# Altium PCB Camera_LED_Module.PcbDoc
Units mm, origin at the board's own origin, x right, y up, seen from the top; angles counter-clockwise.
Board outline 152.4 x 101.6 mm, 2 copper layers (Top Layer, Bottom Layer); 32 components, 17 nets, 82 pads, 0 vias.
Unrouted connection lines stored in the file: 60.
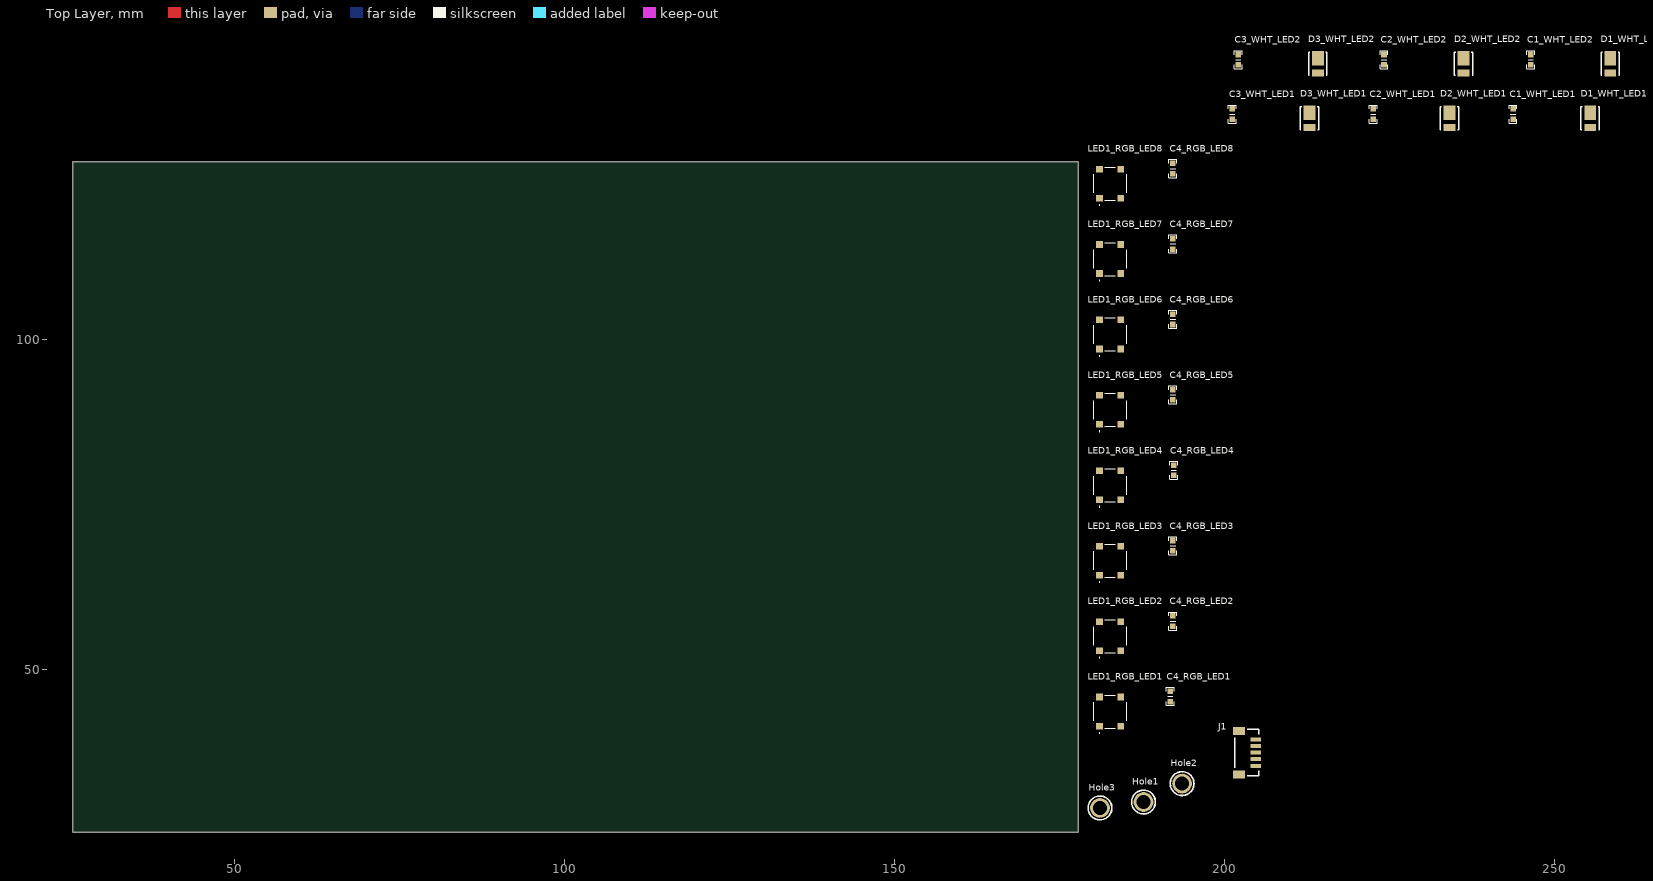
[diagram p0: Top Layer view]
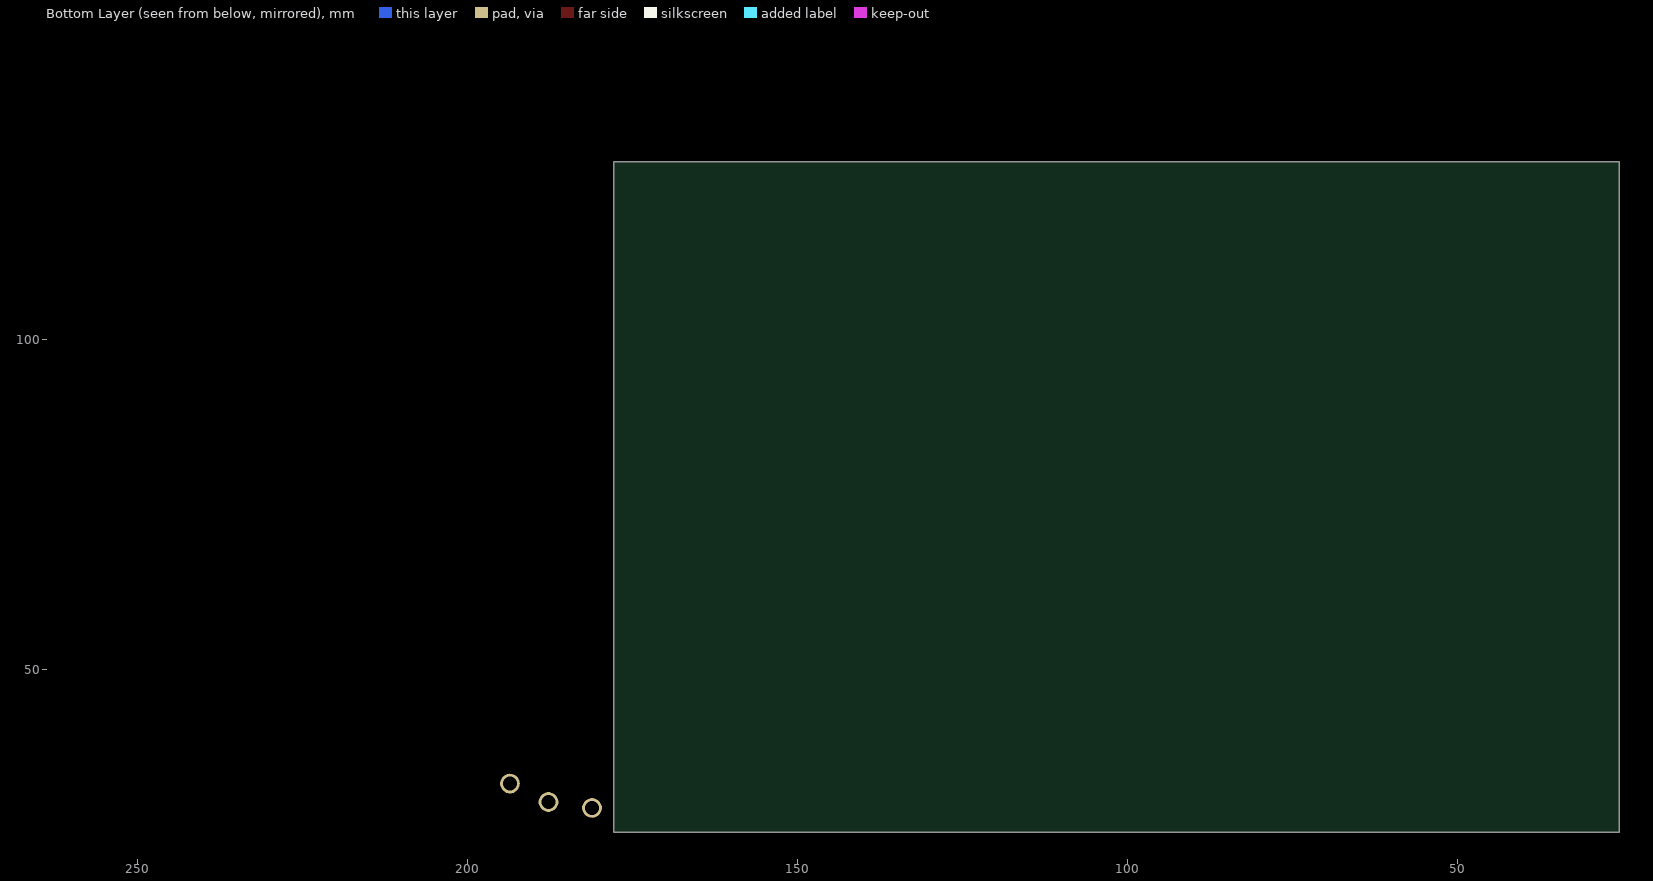
[diagram p1: Bottom Layer view, seen from below]

## Layer stack, top to bottom
Top Solder: solder mask 0.0102, Solder Resist, Dk 3.5
Top Layer: signal copper 0.0356
Dielectric 1: dielectric 0.32, FR-4, Dk 4.8
Bottom Layer: signal copper 0.0356
Bottom Solder: solder mask 0.0102, Solder Resist, Dk 3.5

## Board outline
25.4,25.4 177.8,25.4 177.8,127 25.4,127

## Design rules (kind name [scope] priority, off if disabled: settings)
BoardOutlineClearance [All] p1: gap=0.2 ignorepadtopadclearanceinfootprint=FALSE
Clearance "Stitching GND" [IsStitchingVia and InNet('GND') vs (IsVia and (Not IsStitchingVia)) Or IsPad] p1: gap=0.2 ignorepadtopadclearanceinfootprint=FALSE except(0.15: SMDPad-SMDPad; 0.28: Arc-Hole Track-Hole)
Clearance [All] p2: gap=0.2 ignorepadtopadclearanceinfootprint=FALSE except(0.15: SMDPad-SMDPad; 0.28: Arc-Hole Track-Hole)
HoleSize [All] p1: absolutevalues=TRUE maxlimit=6 minlimit=0.3 maxpercent=80.000 minpercent=20.000
HoleToHoleClearance HoleToHolePad [IsPad vs IsPad] p1: gap=0.45 allowstackedmicrovias=TRUE
HoleToHoleClearance HoleToHoleVia [IsVia vs IsVia] p2: gap=0.2 allowstackedmicrovias=TRUE
HoleToHoleClearance [All] p3: gap=0.3 allowstackedmicrovias=TRUE
MinimumAnnularRing MinimumViaAnnularRing [IsVia] p1: minimumring=0.15
MinimumAnnularRing [All] p2: minimumring=0.254
MinimumSolderMaskSliver [All] p1: minsoldermaskwidth=0.1
PlaneConnect [All] p1: planeconnectstyle=Relief reliefexpansion=0.508 reliefentries=4 reliefconductorwidth=0.32 reliefairgap=0.254
PolygonConnect MolexPwrGND [InNet('GND') vs IsPad And HasFootprint('43045-08YY_121314')] p1: connectstyle=Relief reliefconductorwidth=1 reliefentries=4 polygonreliefangle="90 Angle" conductorbypadedge=TRUE mindistance=0.381 enablemindistance=FALSE airgapwidth=0.35
PolygonConnect DRVTherrmalGND [InNet('GND') vs IsPad And HasFootprint('RXZ0016A-MFG')] p2: connectstyle=Direct reliefconductorwidth=0.254 reliefentries=4 polygonreliefangle="90 Angle" airgapwidth=0.254
PolygonConnect GNDStitchingDirect [InNet('GND')] p3: thpad.connectstyle=Relief thpad.reliefconductorwidth=0.32 thpad.reliefentries=4 thpad.polygonreliefangle="90 Angle" thpad.airgapwidth=0.254 thpad.conductorbypadedge=TRUE thpad.mindistance=0.381 thpad.enablemindistance=FALSE smdpad.connectstyle=Relief smdpad.reliefconductorwidth=0.32 smdpad.reliefentries=4 smdpad.polygonreliefangle="90 Angle" smdpad.airgapwidth=0.254 smdpad.conductorbypadedge=TRUE smdpad.mindistance=0.381 smdpad.enablemindistance=FALSE via.connectstyle=Direct via.reliefconductorwidth=0.254 via.reliefentries=4 via.polygonreliefangle="90 Angle" via.airgapwidth=0.254
PolygonConnect [All] p4: connectstyle=Relief reliefconductorwidth=0.32 reliefentries=4 polygonreliefangle="90 Angle" conductorbypadedge=TRUE mindistance=0.381 enablemindistance=FALSE airgapwidth=0.254
RoutingVias PowerVias [InNetClass('POWER') or InNet('GND')] p1: holewidth=0.5 width=0.8 viastyle="Through Hole" minholewidth=0.3 minwidth=0.6 maxholewidth=1.2 maxwidth=1.6
RoutingVias SignalVias [All] p2: holewidth=0.3 width=0.6 viastyle="Through Hole" minholewidth=0.3 minwidth=0.6 maxholewidth=0.5 maxwidth=0.8
SilkToSilkClearance [All] p1: silktosilkclearance=0.1
SilkToSolderMaskClearance [IsPad] p1: minsilkscreentomaskgap=0.1 clearancetoexposedcopper=TRUE
SolderMaskExpansion [All] p1: expansion=0.05 istentingtop=FALSE
SupplyNets "Schematic Supply Nets_1" [InNet('GND')] p1: voltage=0.000
SupplyNets "Schematic Supply Nets" [InNet('+5V')] p2: voltage=0.000
Width WidthPower [InNetClass('POWER') or InNet('GND')] p1: maxlimit=3 minlimit=0.2 preferedwidth=0.6
Width WidthSignal [All] p2: maxlimit=1 minlimit=0.2 preferedwidth=0.3
24 further rules are at their usual default settings.

## Classes and differential pairs
channel class Series_White_LEDs: WHT_LED1 WHT_LED2
channel class Neopixel_LED: RGB_LED1 RGB_LED2 RGB_LED3 RGB_LED4 RGB_LED5 RGB_LED6 RGB_LED7 RGB_LED8
net class NEO_DIN[2..8]: NEO_DIN2 NEO_DIN3 NEO_DIN4 NEO_DIN5 NEO_DIN6 NEO_DIN7 NEO_DIN8
component class WHT_LED2: C1_WHT_LED2 C2_WHT_LED2 C3_WHT_LED2 D1_WHT_LED2 D2_WHT_LED2 D3_WHT_LED2
component class WHT_LED1: C1_WHT_LED1 C2_WHT_LED1 C3_WHT_LED1 D1_WHT_LED1 D2_WHT_LED1 D3_WHT_LED1
component class RGB_LED8: C4_RGB_LED8 LED1_RGB_LED8
component class RGB_LED7: C4_RGB_LED7 LED1_RGB_LED7
component class RGB_LED6: C4_RGB_LED6 LED1_RGB_LED6
component class RGB_LED5: C4_RGB_LED5 LED1_RGB_LED5
component class RGB_LED4: C4_RGB_LED4 LED1_RGB_LED4
component class RGB_LED3: C4_RGB_LED3 LED1_RGB_LED3
component class RGB_LED2: C4_RGB_LED2 LED1_RGB_LED2
component class RGB_LED1: C4_RGB_LED1 LED1_RGB_LED1
component class Camera_LED_Module: Hole1 Hole2 Hole3 J1

## Components (designator, comment, footprint, x,y, rotation, side; value= is the part's Value field where it differs from the comment)
C1_WHT_LED1 "10nF" CAP_SMD_603 243.713,134.239 r90 top (schematic designator C1)
C1_WHT_LED2 "10nF" CAP_SMD_603 246.38,142.494 r90 top (schematic designator C1)
C2_WHT_LED1 "10nF" CAP_SMD_603 222.504,134.239 r90 top (schematic designator C2)
C2_WHT_LED2 "10nF" CAP_SMD_603 224.155,142.494 r90 top (schematic designator C2)
C3_WHT_LED1 "10nF" CAP_SMD_603 201.168,134.239 r90 top (schematic designator C3)
C3_WHT_LED2 "10nF" CAP_SMD_603 202.057,142.494 r90 top (schematic designator C3)
C4_RGB_LED1 "100nF" CAP_SMD_603 191.77,45.974 r90 top (schematic designator C4)
C4_RGB_LED2 "100nF" CAP_SMD_603 192.151,57.404 r90 top (schematic designator C4)
C4_RGB_LED3 "100nF" CAP_SMD_603 192.151,68.834 r90 top (schematic designator C4)
C4_RGB_LED4 "100nF" CAP_SMD_603 192.278,80.264 r90 top (schematic designator C4)
C4_RGB_LED5 "100nF" CAP_SMD_603 192.151,91.694 r90 top (schematic designator C4)
C4_RGB_LED6 "100nF" CAP_SMD_603 192.151,103.124 r90 top (schematic designator C4)
C4_RGB_LED7 "100nF" CAP_SMD_603 192.151,114.554 r90 top (schematic designator C4)
C4_RGB_LED8 "100nF" CAP_SMD_603 192.151,125.984 r90 top (schematic designator C4)
D1_WHT_LED1 "L128-6580SA35A0DF1" "CREE J 2835" 255.397,133.477 r90 top (schematic designator D1)
D1_WHT_LED2 "L128-6580SA35A0DF1" "CREE J 2835" 258.445,141.732 r90 top (schematic designator D1)
D2_WHT_LED1 "L128-6580SA35A0DF1" "CREE J 2835" 234.061,133.477 r90 top (schematic designator D2)
D2_WHT_LED2 "L128-6580SA35A0DF1" "CREE J 2835" 236.22,141.732 r90 top (schematic designator D2)
D3_WHT_LED1 "L128-6580SA35A0DF1" "CREE J 2835" 212.852,133.477 r90 top (schematic designator D3)
D3_WHT_LED2 "L128-6580SA35A0DF1" "CREE J 2835" 214.122,141.732 r90 top (schematic designator D3)
Hole1 "Hole" Hole_2mm 187.706,29.972 r0 top
Hole2 "Hole" Hole_2mm 193.548,32.766 r0 top
Hole3 "Hole" Hole_2mm 181.102,29.083 r0 top
J1 "BM05B-SRSS-TB(LF)(SN)" "JST BM05B-SRSS-TB" 203.454,37.465 r90 top
LED1_RGB_LED1 "IN-PI55TATPRPGPB" INPI55TATPRPGPB 182.626,43.688 r90 top (schematic designator LED1)
LED1_RGB_LED2 "IN-PI55TATPRPGPB" INPI55TATPRPGPB 182.626,55.118 r90 top (schematic designator LED1)
LED1_RGB_LED3 "IN-PI55TATPRPGPB" INPI55TATPRPGPB 182.626,66.548 r90 top (schematic designator LED1)
LED1_RGB_LED4 "IN-PI55TATPRPGPB" INPI55TATPRPGPB 182.626,77.978 r90 top (schematic designator LED1)
LED1_RGB_LED5 "IN-PI55TATPRPGPB" INPI55TATPRPGPB 182.626,89.408 r90 top (schematic designator LED1)
LED1_RGB_LED6 "IN-PI55TATPRPGPB" INPI55TATPRPGPB 182.626,100.838 r90 top (schematic designator LED1)
LED1_RGB_LED7 "IN-PI55TATPRPGPB" INPI55TATPRPGPB 182.626,112.268 r90 top (schematic designator LED1)
LED1_RGB_LED8 "IN-PI55TATPRPGPB" INPI55TATPRPGPB 182.626,123.698 r90 top (schematic designator LED1)

## Footprints (in the part's own frame and the unit in brackets; to place one, negate y for a bottom-side part, rotate by r counter-clockwise, add the part's x,y. Pads: shape width x height; smd on the part's side, far side on the other; paste and mask are expansions set on the pad)
CAP_SMD_603 [mm]
  rect 0.85x0.85 smd: 1(-0.775,0) 2(0.775,0)
  silkscreen extent -1.37,-0.59 1.37,0.59, body extent -0.8,-0.4 0.8,0.4, height 0.9
"CREE J 2835" [mm] "LED, 2-Leads, Body 3.5x2.8mm, CREE JE2835AWT-00-0000-000A0ZF627E"
  rect 2.2x1.8 smd: 1(0.962,0)
  rect 1.1x1.8 smd: 2(-1.278,0)
  silkscreen extent -1.64,-1.39 1.9,1.4, body extent -1.62,-1.4 1.9,1.4, height 0.7
Hole_2mm [mm]
  round 3 hole 2.15: 1(0,0)
  silkscreen extent -1.8,-1.8 1.8,1.8
INPI55TATPRPGPB [mm]
  rect 1x1 smd: 1(-2.2,1.6) 2(-2.2,-1.6) 3(2.2,-1.6) 4(2.2,1.6)
  silkscreen extent -3.3,-2.5 2.5,2.5, body extent -2.7,-2.5 2.7,2.5, height 1.6
"JST BM05B-SRSS-TB" [mm] "1.0mm pitch/Disconnectable Crimp style connector"
  rect 0.6x1.55 smd: 1(-2,-1.262) 2(-1,-1.262) 3(0,-1.262) 4(1,-1.262) 5(2,-1.262)
  rect 1.2x1.8 smd: M(-3.3,1.262) M(3.3,1.262)
  silkscreen extent -3.53,-1.68 3.53,1.91, body extent -3.5,-1.69 3.5,1.91, height 4.32

## Part data
C1_WHT_LED1 C1_WHT_LED2 C2_WHT_LED1 C2_WHT_LED2 C3_WHT_LED1 C3_WHT_LED2 C4_RGB_LED1 C4_RGB_LED2 C4_RGB_LED3 C4_RGB_LED4 C4_RGB_LED5 C4_RGB_LED6 C4_RGB_LED7 C4_RGB_LED8: library part "Non-polar Capacitor", "Generic Ceramic Capacitor", Voltage=16V
D1_WHT_LED1 D1_WHT_LED2 D2_WHT_LED1 D2_WHT_LED2 D3_WHT_LED1 D3_WHT_LED2: library part JE2835AWT-R-H40GA0000-N0000001, "LED COOL WHITE 6500K LUXEON 2835 2.7V", Part Number=L128-6580SA35A0DF1
J1: "CONN HEADER SMD 5POS 1MM", Current Rating (Amps)=0.7A, Insulation Color=Natural, Manufacturer="JST Sales America Inc.", Material Flammability Rating="UL94 V-0", Operating Temperature="-25°C ~ 85°C", Supplier Part Number 1=455-1791-1-ND, Voltage Rating=50V, ComponentLink1Description=Datasheet, ComponentLink1URL=http://www.jst-mfg.com/product/pdf/eng/eSR.pdf, ComponentLink2Description="DigiKey Link", ComponentLink2URL=http://digikey.com/product-detail/en/jst-sales-america-inc/BM05B-SRSS-TB-LF-SN/455-1791-1-ND/926862, Connector Type=Header, Contact Finish - Mating=Tin, Contact Finish - Post=Tin, Contact Material="Copper Alloy", Contact Shape=Square, Contact Type="Male Pin", Fastening Type=Push-Pull, Features="Solder Retention", Insulation Height="0.167\" (4.25mm)", Insulation Material="Polyamide (PA), Nylon", LastUpdated="1/12/2020 10:14:00 PM", Lifecycle Status=Active, Minimum Order=1, Mounting Type="Surface Mount", Number of Positions=5, Number of Positions Loaded=All, Number of Rows=1, Packaging=TapeAndReel, Part Number=BM05B-SRSS-TB(LF)(SN), Part Status=Active, PartId=18, Pitch - Mating="0.039\" (1.00mm)", Price=0.35, Series=SR, Shrouding="Shrouded - 4 Wall", Style="Board to Cable/Wire", Supplier 1=DigiKey, Termination=Solder
LED1_RGB_LED1 LED1_RGB_LED2 LED1_RGB_LED3 LED1_RGB_LED4 LED1_RGB_LED5 LED1_RGB_LED6 LED1_RGB_LED7 LED1_RGB_LED8: "LED (Multiple)", Manufacturer_Name=Inolux, Mouser Part Number=743-IN-PI55TATPRPGPB, Arrow Part Number=IN-PI55TATPRPGPB, Arrow Price/Stock=https://www.arrow.com/en/products/in-pi55tatprpgpb/inolux-corporation?region=nac, Datasheet Link=https://www.futureelectronics.com/p/semiconductors--lighting-solutions--led-light-modules/in-pi55tatprpgpb-inolux-9107211, Height=1.6mm, Manufacturer_Part_Number=IN-PI55TATPRPGPB, Mouser Price/Stock=https://www.mouser.co.uk/ProductDetail/Inolux/IN-PI55TATPRPGPB?qs=mAH9sUMRCttUWI%2F2sR%2FcZg%3D%3D

## Nets (pads, with @x,y where several pads share a name; then routed paths per layer and width w, separated by ;. In a path a pad name is that pad's centre, name@x,y a point inside that pad or via, vN(x,y) a via of type N, cw(c..) or ccw(c..) an arc to the next point about the centre after c; other vN are vias at no path point)
+5V: C4_RGB_LED1.1 C4_RGB_LED2.1 C4_RGB_LED3.1 C4_RGB_LED4.1 C4_RGB_LED5.1 C4_RGB_LED6.1 C4_RGB_LED7.1 C4_RGB_LED8.1 J1.5 LED1_RGB_LED1.1 LED1_RGB_LED2.1 LED1_RGB_LED3.1 LED1_RGB_LED4.1 LED1_RGB_LED5.1 LED1_RGB_LED6.1 LED1_RGB_LED7.1 LED1_RGB_LED8.1
CC_LED1: C1_WHT_LED1.1 D1_WHT_LED1.1 J1.3
CC_LED2: C1_WHT_LED2.1 D1_WHT_LED2.1 J1.2
GND: C3_WHT_LED1.2 C3_WHT_LED2.2 C4_RGB_LED1.2 C4_RGB_LED2.2 C4_RGB_LED3.2 C4_RGB_LED4.2 C4_RGB_LED5.2 C4_RGB_LED6.2 C4_RGB_LED7.2 C4_RGB_LED8.2 D3_WHT_LED1.2 D3_WHT_LED2.2 J1.1 LED1_RGB_LED1.3 LED1_RGB_LED2.3 LED1_RGB_LED3.3 LED1_RGB_LED4.3 LED1_RGB_LED5.3 LED1_RGB_LED6.3 LED1_RGB_LED7.3 LED1_RGB_LED8.3
NEO_DIN1: J1.4 LED1_RGB_LED1.4
NEO_DIN2: LED1_RGB_LED1.2 LED1_RGB_LED2.4
NEO_DIN3: LED1_RGB_LED2.2 LED1_RGB_LED3.4
NEO_DIN4: LED1_RGB_LED3.2 LED1_RGB_LED4.4
NEO_DIN5: LED1_RGB_LED4.2 LED1_RGB_LED5.4
NEO_DIN6: LED1_RGB_LED5.2 LED1_RGB_LED6.4
NEO_DIN7: LED1_RGB_LED6.2 LED1_RGB_LED7.4
NEO_DIN8: LED1_RGB_LED7.2 LED1_RGB_LED8.4
NEO_DOUT8: LED1_RGB_LED8.2
NetC1_WHT_LED1_2: C1_WHT_LED1.2 C2_WHT_LED1.1 D1_WHT_LED1.2 D2_WHT_LED1.1
NetC1_WHT_LED2_2: C1_WHT_LED2.2 C2_WHT_LED2.1 D1_WHT_LED2.2 D2_WHT_LED2.1
NetC2_WHT_LED1_2: C2_WHT_LED1.2 C3_WHT_LED1.1 D2_WHT_LED1.2 D3_WHT_LED1.1
NetC2_WHT_LED2_2: C2_WHT_LED2.2 C3_WHT_LED2.1 D2_WHT_LED2.2 D3_WHT_LED2.1
pads on no net: Hole1.1 Hole2.1 Hole3.1 J1.M